# EAGLE board a (EAGLE 6.4)
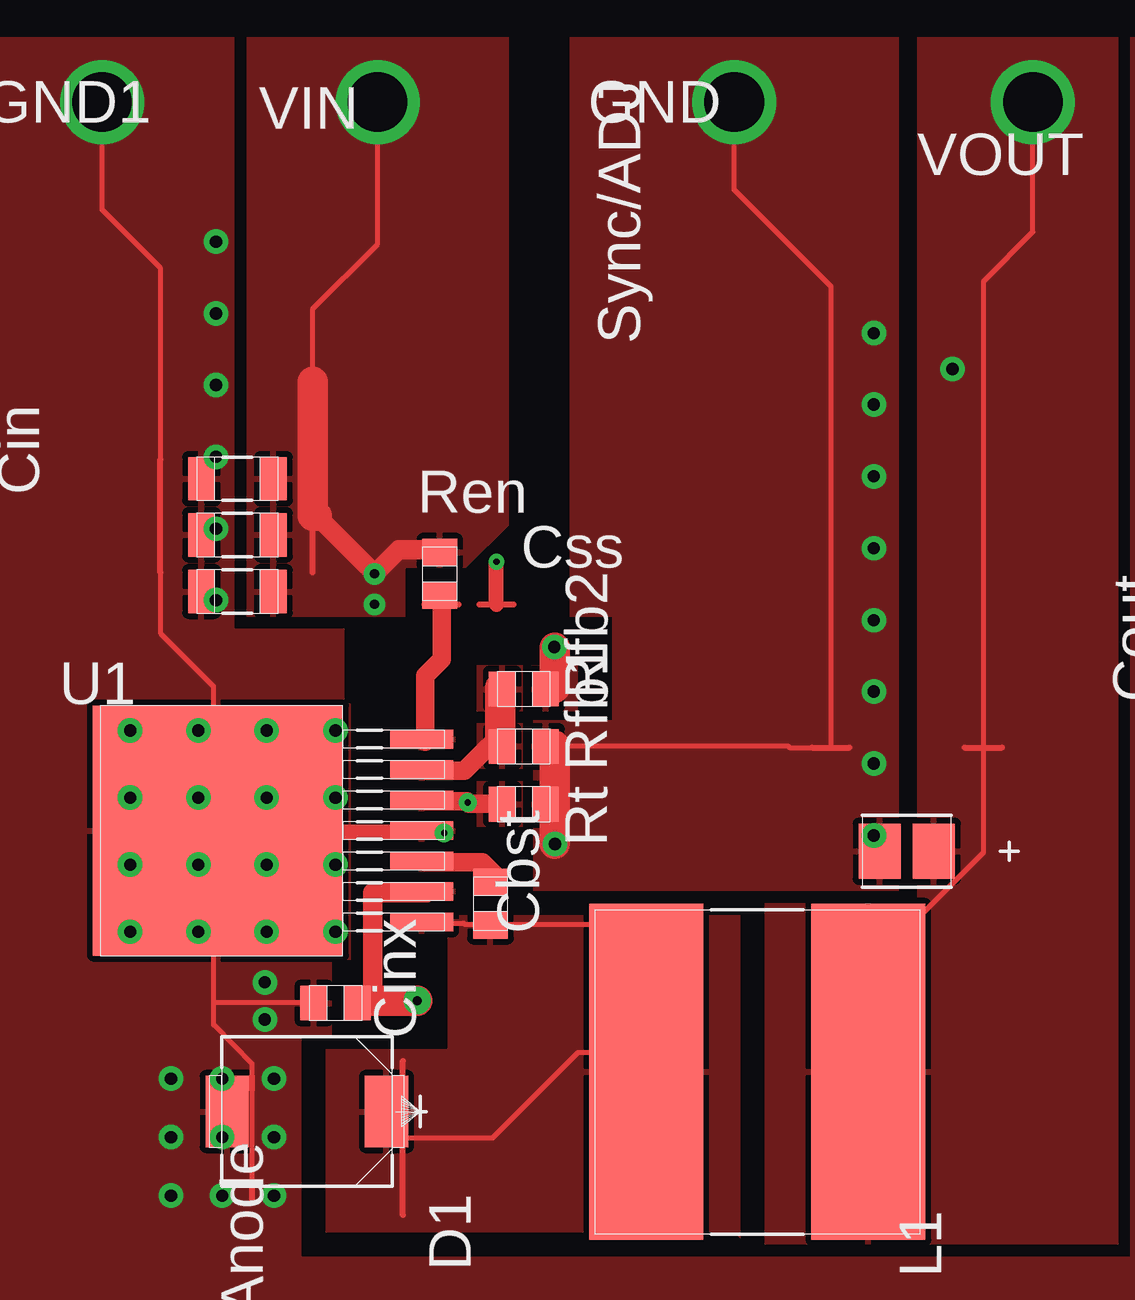
[diagram p0: board, top side]
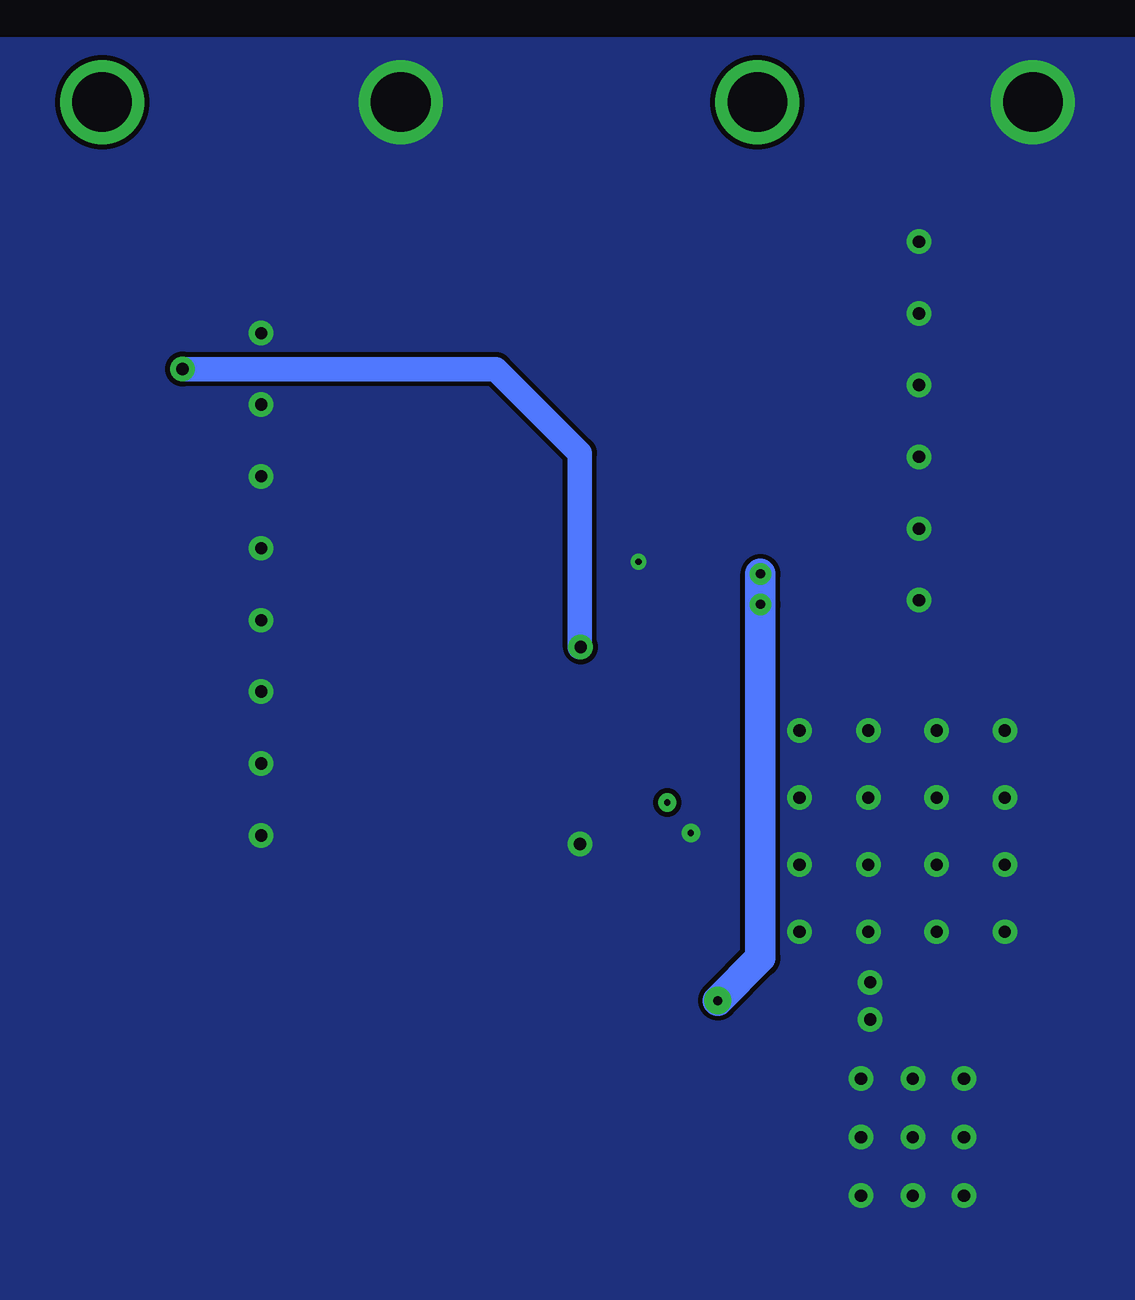
[diagram p1: board, bottom side, seen from below]

No outline drawn. Coordinates in mm, seen from the top.
Copper layers ((1*2)+(15*16)): TOP / INTERNAL1 / layer 15 / BOTTOM

## Footprints (pad centres in the part's own frame; a part is rotated, then mirrored left to right if it is on the bottom)
0805 = smd 1.118 x 1.448: 1 -0.902,0; 2 0.902,0
1206 = smd 1.118 x 1.803: 1 -1.499,0; 2 1.499,0
3528-21 = smd 1.753 x 2.311: 1 -1.13,0; 2 1.13,0
SMC = smd 1.803 x 2.972: 1 -3.315,0; 2 3.315,0
TP-1502 = drill 0.813 round: 1 0,0
SDR1307 = smd 4.75 x 13.995: 1 -4.623,0; 2 4.623,0
TJ7A = smd 0.787 x 2.616: 1 -3.81,-8.344; 2 -2.54,-8.344; 3 -1.27,-8.344; 4 0,-8.344; 5 1.27,-8.344; 6 2.54,-8.344; 7 3.81,-8.344 | smd 10.414 x 10.414: 8 0,0.152

## Placement (x,y rotation side)
Cbst  [0805]  53.85,44.68 90 top
Cin_1  [1206]  43.31,57.68 180 top
Cin_2  [1206]  43.31,60.05 180 top
Cin_3  [1206]  43.31,62.38 180 top
Cinx  [0805]  47.4,40.54 180 top
Cout  [3528-21]  71.2,46.86 180 top
D1  [SMC]  46.2,36.02 180 top
GND  [TP-1502]  63.98,78.05 0 top
GND1  [TP-1502]  37.64,78.05 0 top
L1  [SDR1307]  64.97,37.67 0 top
Ren  [0805]  51.74,58.42 90 top
Rfb1  [0805]  55.24,51.23 0 top
Rfb2  [0805]  55.24,53.62 180 top
Rt  [0805]  55.24,48.82 0 top
U1  [TJ7A]  42.65,47.73 90 top
VIN  [TP-1502]  49.15,78.05 0 top
VOUT  [TP-1502]  76.43,78.05 0 top

## Library data of the parts
Cbst = ultra-librarian; RefDes: Cbst; Type: C0805C103K5RACTU
Cin_1-Cin_3 = ultra-librarian
Cinx = ultra-librarian; RefDes: Cinx; Type: GMK212B7105KG-T
Cout = ultra-librarian; RefDes: Cout; Type: 8TPE100MAZB
D1 = ultra-librarian; RefDes: D1; Type: B560C-13-F
GND = ultra-librarian; RefDes: GND; Type: TP-1502
GND1 = ultra-librarian; RefDes: GND1; Type: TP-1502
L1 = ultra-librarian; RefDes: L1; Type: SDR1307-100ML
Ren = ultra-librarian; RefDes: Ren; Type: 08051A100CAT2A
Rfb1 = ultra-librarian; RefDes: Rfb1; Type: 08051A100CAT2A
Rfb2 = ultra-librarian; RefDes: Rfb2; Type: 08051A100CAT2A
Rt = ultra-librarian; RefDes: Rt; Type: 08051A100CAT2A
U1 = ultra-librarian; RefDes: U1; Type: LM22679TJ-5.0/NOPB
VIN = ultra-librarian; RefDes: VIN; Type: TP-1502
VOUT = ultra-librarian; RefDes: VOUT; Type: TP-1502

## Nets
0: Cin_1.2 Cin_2.2 Cin_3.2 Cinx.2 Cout.2 D1.2 GND1.1 GND.1 Rfb1.2 Rt.2 U1.4 U1.8
1: Ren.1 U1.7
2: Cout.1 L1.2 Rfb1.1 Rfb2.1 Rfb2.2 U1.6 VOUT.1
3: Cin_1.1 Cin_2.1 Cin_3.1 Cinx.1 Ren.2 U1.2 VIN.1
4: Cbst.1 D1.1 L1.1 U1.1
5: Cbst.2 U1.3
6: Rt.1 U1.5

## Tracks (layer width: path | path; a pad name or v marks a point on that pad's centre or on a via)
0  (via drill 0.25 pad 0.61, 0.25 pad 0.76, 0.51 pad 1.02, 2.49 pad 3.48)
  TOP 0.203: 43.92,32.64 43.92,37.19 43.92,38 42.32,39.62 42.32,47.68 42.32,53.72 40.11,55.93 40.11,60.83 40.11,66.42 40.11,71.14 37.67,73.58 v37.67,78.08 | 43.92,32.64 | 42.34,40.56 46.2,40.56 | 56.54,51.26 66.24,51.26 66.32,51.18 68.05,51.18 68.05,57.78 68.05,70.38 64.01,74.42 v64.01,78.08
  TOP 0.254: 43.92,36.91 43.92,37.49 | 43.92,32.33 43.92,32.92 | 67.26,51.18 68.81,51.18 | 40.09,58.47 40.09,63.2 | 53.39,57.15 54.81,57.15
  TOP 0.635: 44.45,49.28 44.45,49.02 45.8,47.68 51.18,47.68 | 54.1,57.15 v54.1,58.93
  TOP 1.27: v56.54,47.17 56.54,48.84 56.54,51.26
  other vias: 51.92,47.62 42.67,32.51 42.67,34.95 42.67,37.39 44.83,37.39 44.83,34.95 40.54,34.95 40.54,37.39 69.82,68.45 69.82,65.48 69.82,62.48 69.82,59.49 69.82,56.49 69.82,53.52 69.82,50.52 69.82,47.52 40.54,32.51 44.83,32.51 44.45,41.4 38.84,49.1 38.84,46.3 38.84,43.51 41.68,43.51 41.68,46.3 41.68,49.1 44.53,49.1 44.53,46.3 44.53,43.51 47.4,43.51 47.4,46.3 47.4,49.1 47.4,51.89 44.53,51.89 41.68,51.89 38.84,51.89 42.42,57.33 42.42,60.3 42.42,63.3 42.42,66.29 42.42,69.27 42.42,72.26 44.45,39.85
  pour TOP (rank 5): 49.99,47.27 49.99,48.08 52.37,48.08 52.37,47.27
  pour TOP (rank 5): 36.6,42.34 36.6,53.01 48.03,53.01 48.03,42.34
  pour TOP (rank 6): 55.58,47.88 55.58,49.78 57.48,49.78 57.48,47.88
  pour TOP (rank 6): 55.58,50.29 55.58,52.2 57.48,52.2 57.48,50.29
  pour TOP: 43.18,80.77 43.18,56.13 47.75,56.13 47.75,42.42 47.24,42.42 47.24,39.12 45.97,39.12 45.97,29.97 80.52,29.97 80.52,80.77 90.17,80.77 90.17,25.91 25.91,25.91 25.91,80.77
  pour TOP: 55.63,45.21 70.87,45.21 70.87,80.77 57.15,80.77 57.15,56.64 58.93,56.64 58.93,52.32 55.63,52.32
  pour BOTTOM (rank 6): 25.91,25.91 25.91,80.77 90.17,80.77 90.17,25.91
1
  TOP 0.254: 51.1,57.15 52.53,57.15
  TOP 0.762: 51.13,51.44 51.13,54.18 51.82,54.86 51.82,57.15
  pour TOP (rank 2): 49.99,51.08 49.99,51.89 52.37,51.89 52.37,51.08
2  (via drill 0.51 pad 1.02, 2.49 pad 3.48)
  TOP 0.203: v56.52,55.37 56.54,55.35 | 70.46,38.48 70.46,42.88 74.4,46.81 74.4,51.18 74.4,57.78 74.4,70.61 76.45,72.67 | 76.45,72.67 76.45,77.98 | 76.45,72.67
  TOP 0.254: 73.61,51.18 75.16,51.18
  TOP 0.762: 51.18,50.22 52.76,50.22 53.8,51.26 54.25,51.26
  TOP 1.27: 54.25,51.26 54.25,53.67 | 56.54,53.67 56.54,55.35
  BOTTOM 1.016: v73.1,66.95 60.05,66.95 56.54,63.45 56.54,55.37
  other vias: 76.45,78.08
  pour TOP (rank 2): 49.99,49.81 49.99,50.62 52.37,50.62 52.37,49.81
  pour TOP (rank 3): 53.29,50.29 53.29,52.2 55.19,52.2 55.19,50.29
  pour TOP (rank 3): 55.58,52.7 55.58,54.61 57.48,54.61 57.48,52.7
  pour TOP (rank 4): 53.29,52.7 53.29,54.61 55.19,54.61 55.19,52.7
  pour TOP (rank 4): 80.01,80.77 80.01,30.48 65.28,30.48 65.28,44.7 71.63,44.7 71.63,80.77
3  (via drill 0.38 pad 0.89, 0.38 pad 1.14, 2.49 pad 3.48)
  TOP 0.203: 46.46,66.42 46.46,69.47 49.15,72.16 v49.15,78.08
  TOP 0.254: 46.44,58.47 46.44,63.2
  TOP 0.813: 48.77,40.64 48.95,40.82 48.95,45.14 51.18,45.14 | 51.82,59.44 50.04,59.44 v49.02,58.42 46.61,60.83 46.48,60.96 46.48,61.21
  TOP 1.27: 48.77,40.64 v50.8,40.64 | 46.61,60.83 46.46,60.83 46.46,66.42
  BOTTOM 1.27: v49.02,58.42 v49.02,57.15 49.02,42.42 v50.8,40.64
  pour TOP: 49.99,44.73 49.99,45.54 52.37,45.54 52.37,44.73
  pour TOP (rank 4): 43.69,56.64 50.29,56.64 50.29,58.67 52.83,58.67 54.61,60.45 54.61,80.77 43.69,80.77
4
  TOP 0.203: 51.18,43.87 52.73,43.87 52.78,43.81 54.08,43.81 58.01,43.81 59.56,42.27 59.56,38.48 57.51,38.48 53.95,34.92 50.22,34.92
  TOP 0.254: 50.2,31.7 50.2,38.12
  pour TOP: 49.99,43.46 49.99,44.27 52.37,44.27 52.37,43.46
  pour TOP (rank 5): 50.04,44.2 64.26,44.2 64.26,30.73 64.01,30.99 46.99,30.99 46.99,38.61 52.07,38.61 52.07,43.43 50.04,43.43
5
  TOP 0.762: 54.1,45.47 54.1,45.82 53.52,46.41 51.18,46.41
  pour TOP: 49.99,46 49.99,46.81 52.37,46.81 52.37,46
6  (via drill 0.25 pad 0.76)
  TOP 0.203: 52.86,48.95 v52.91,48.9
  TOP 0.762: 52.96,48.84 54.25,48.84 | 51.18,48.95 52.86,48.95
  pour TOP (rank 2): 49.99,48.54 49.99,49.35 52.37,49.35 52.37,48.54
  pour TOP (rank 3): 53.29,47.88 53.29,49.78 55.19,49.78 55.19,47.88

## Text on the board
tDocu: Sync/ADJ | Cin | Css | Anode